# EAGLE board FillControl (EAGLE 9.5.1)

Size 160 x 100 mm. Coordinates in mm from the lower left corner, seen from the top.
Outline: 0,0 160,0 160,100 0,100 0,0
Copper layers (1*16): Top 0.035mm / dielectric 1.5mm / Bottom 0.035mm
Design rules "default": minimum track width 6mil, minimum drill 0.35mm, track to track 6mil, track to pad 6mil, pad to pad 6mil, via to via 6mil, smd to smd 6mil, copper to edge 40mil, drill to drill 6mil, minimum pad ring 10mil, minimum via ring 8mil, stop-mask expansion 4mil, vias tented up to drill 0mil, thermal gap 10mil

## Footprints (pad centres in the part's own frame; a part is rotated, then mirrored left to right if it is on the bottom)
CAP_UCD_8X6P2 = smd 3.912 x 1.626: 1 -3.2,0; 2 3.2,0
CAP_ULH_10X10 = smd 3.81 x 1.905: 1 -4.255,0; 2 4.255,0
DIODE_SOD323 = smd 0.584 x 0.457: 1 -1.055,0; 2 1.055,0
SMC = smd 2.18 x 3.078: 1 -3.127,0; 2 3.127,0
FUS_VISHAY_MFU0805 = smd 0.902 x 1.397: 1 -0.895,0; 2 0.895,0
RELAY_1-1721150-0 = drill 1.295 pad 2.54: 1 -12.192,11.989; 2 -12.192,0; 3 0,11.989; 4 0,0; 5 2.007,5.994
IND_BOURNS_SRR1210 = smd 2.794 x 5.309: 1 -5.042,0; 2 5.042,0
R0603 = smd 1 x 1.1: 1 -0.85,0; 2 0.85,0
SOP-4L_TC = smd 2.007 x 0.94: 1 -4.597,1.27; 2 -4.597,-1.27; 3 4.597,-1.27; 4 4.597,1.27
SOT-23 = smd 0.813 x 0.889: B -1.025,-0.945; C 0,0.945; E 1.025,-0.945
TS5B = smd 1.016 x 2.692: 1 -3.404,-8.28; 2 -1.702,-8.28; 3 0,-8.28; 4 1.702,-8.28; 5 3.404,-8.28 | smd 10.465 x 10.871: 6 0,0
DGS10 = smd 1.575 x 0.229: 1 -2.095,1; 2 -2.095,0.5; 3 -2.095,0; 4 -2.095,-0.5; 5 -2.095,-1; 6 2.095,-1; 7 2.095,-0.5; 8 2.095,0; 9 2.095,0.5; 10 2.095,1
2X20_FEMALE_HEADER = drill 1.105 pad 1.705: 1 0,0; 2 0,2.54; 3 2.54,0; 4 2.54,2.54; 5 5.08,0; 6 5.08,2.54; 7 7.62,0; 8 7.62,2.54; 9 10.16,0; 10 10.16,2.54; 11 12.7,0; 12 12.7,2.54; 13 15.24,0; 14 15.24,2.54; 15 17.78,0; 16 17.78,2.54; 17 20.32,0; 18 20.32,2.54; 19 22.86,0; 20 22.86,2.54; 21 25.4,0; 22 25.4,2.54; 23 27.94,0; 24 27.94,2.54; 25 30.48,0; 26 30.48,2.54; 27 33.02,0; 28 33.02,2.54; 29 35.56,0; 30 35.56,2.54; 31 38.1,0; 32 38.1,2.54; 33 40.64,0; 34 40.64,2.54; 35 43.18,0; 36 43.18,2.54; 37 45.72,0; 38 45.72,2.54; 39 48.26,0; 40 48.26,2.54

## Placement (x,y rotation side)
C1  4.7uF  [CAP_UCD_8X6P2]  -45.72,48.26 0 top  (outside the outline)
C2  [CAP_ULH_10X10]  -58.42,45.72 0 top  (outside the outline)
D1  [DIODE_SOD323]  -69.85,83.82 0 top  (outside the outline)
D2  [DIODE_SOD323]  -73.66,83.82 0 top  (outside the outline)
D3  [DIODE_SOD323]  -77.47,83.82 0 top  (outside the outline)
D4  [DIODE_SOD323]  -81.28,83.82 0 top  (outside the outline)
D5  [DIODE_SOD323]  -15.24,87.63 0 top  (outside the outline)
D6  [DIODE_SOD323]  -19.05,87.63 0 top  (outside the outline)
D7  [SMC]  -69.85,44.45 0 top  (outside the outline)
F1  FUSE  [FUS_VISHAY_MFU0805]  -80.01,-3.81 0 top  (outside the outline)
K1  [RELAY_1-1721150-0]  -17.78,2.54 0 top  (outside the outline)
K2  [RELAY_1-1721150-0]  -38.1,2.54 0 top  (outside the outline)
K3  [RELAY_1-1721150-0]  -58.42,2.54 0 top  (outside the outline)
K4  [RELAY_1-1721150-0]  -17.78,22.86 0 top  (outside the outline)
K5  [RELAY_1-1721150-0]  -38.1,22.86 0 top  (outside the outline)
K6  [RELAY_1-1721150-0]  -58.42,22.86 0 top  (outside the outline)
L1  [IND_BOURNS_SRR1210]  -33.02,46.99 0 top  (outside the outline)
R1  [R0603]  -35.56,83.82 0 top  (outside the outline)
R2  [R0603]  -39.37,83.82 0 top  (outside the outline)
R3  [R0603]  -43.18,83.82 0 top  (outside the outline)
R4  [R0603]  -46.99,83.82 0 top  (outside the outline)
R5  [R0603]  -50.8,83.82 0 top  (outside the outline)
R6  [R0603]  -54.61,83.82 0 top  (outside the outline)
R7  [R0603]  -58.42,83.82 0 top  (outside the outline)
R8  [R0603]  -62.23,83.82 0 top  (outside the outline)
R9  [R0603]  -66.04,83.82 0 top  (outside the outline)
R10  [R0603]  -62.23,76.2 0 top  (outside the outline)
R11  [R0603]  -31.75,83.82 0 top  (outside the outline)
R12  [R0603]  -67.31,76.2 0 top  (outside the outline)
R13  [R0603]  -72.39,76.2 0 top  (outside the outline)
R14  [R0603]  -77.47,76.2 0 top  (outside the outline)
R15  [R0603]  -82.55,76.2 0 top  (outside the outline)
R16  [R0603]  -16.51,83.82 0 top  (outside the outline)
R17  [R0603]  -21.59,83.82 0 top  (outside the outline)
R18  [R0603]  -26.67,83.82 0 top  (outside the outline)
U1  [SOP-4L_TC]  -72.39,62.23 0 top  (outside the outline)
U2  [SOT-23]  -30.48,77.47 0 top  (outside the outline)
U3  [SOP-4L_TC]  -19.05,69.85 0 top  (outside the outline)
U4  [SOT-23]  -35.56,77.47 0 top  (outside the outline)
U5  [SOP-4L_TC]  -31.75,69.85 0 top  (outside the outline)
U6  [SOT-23]  -40.64,77.47 0 top  (outside the outline)
U7  [SOP-4L_TC]  -44.45,69.85 0 top  (outside the outline)
U8  [SOT-23]  -45.72,77.47 0 top  (outside the outline)
U9  [SOP-4L_TC]  -57.15,69.85 0 top  (outside the outline)
U10  [SOT-23]  -50.8,77.47 0 top  (outside the outline)
U11  [SOP-4L_TC]  -69.85,69.85 0 top  (outside the outline)
U12  [SOT-23]  -55.88,77.47 0 top  (outside the outline)
U13  [TS5B]  -19.05,50.8 0 top  (outside the outline)
U14  [DGS10]  -80.01,69.85 0 top  (outside the outline)
U15  [DGS10]  -16.51,77.47 0 top  (outside the outline)
U16  [DGS10]  -24.13,77.47 0 top  (outside the outline)
U$2  [2X20_FEMALE_HEADER]  -63.5,60.96 0 top  (outside the outline)

## Library data of the parts
C1 = FillControl; MANUFACTURER_PART_NUMBER: UUX2A4R7MCL1GS; VENDOR: Nichicon
C2 = FillControl; MANUFACTURER_PART_NUMBER: ULT2D180MNL1GS; VENDOR: Nichicon
D1-D7 K1-K6 U1-U12 U$2 = FillControl
F1 = FillControl; MANUFACTURER_PART_NUMBER: MFU0805FF02000P100; VENDOR: VISHAY
L1 = FillControl; MANUFACTURER_PART_NUMBER: SRR1210680M; VENDOR: Bourns Electronics
R1-R18 = rcl; SPICEPREFIX: R
U13 = FillControl; MANUFACTURER_PART_NUMBER: LM2596SX5.0NOPB; VENDOR: Texas Instruments
U14-U16 = FillControl; MANUFACTURER_PART_NUMBER: ADS1115IDGSR; VENDOR: Texas Instruments

## Nets
+5V: D1.1 D2.1 D3.1 D4.1 D5.1 D6.1 K1.3 K2.3 K3.3 K4.3 K5.3 K6.3 U1.4 U3.4 U5.4 U7.4 U9.4 U11.4
+24V: F1.1
GND: C1.2 C2.2 D7.2 R3.1 R6.1 R9.1 R12.1 R15.1 R18.1 U2.E U4.E U6.E U8.E U10.E U12.E U13.3 U14.3 U15.3 U16.3
N$1: R2.1 U1.3
N$2: D1.2 K1.4 R1.2
N$3: R2.2 U2.B
N$4: R1.1 U2.C
N$5: R3.2 U1.2
N$6: U1.1
N$7: D2.2 K2.4 R4.2
N$8: R5.1 U3.3
N$9: R5.2 U4.B
N$10: R4.1 U4.C
N$11: R6.2 U3.2
N$12: U3.1
N$13: D3.2 K3.4 R7.2
N$14: R8.1 U5.3
N$15: R8.2 U6.B
N$16: R7.1 U6.C
N$17: R9.2 U5.2
N$18: U5.1
N$19: D4.2 K4.4 R10.2
N$20: R11.1 U7.3
N$21: R11.2 U8.B
N$22: R10.1 U8.C
N$23: R12.2 U7.2
N$24: U7.1
N$25: D5.2 K5.4 R13.2
N$26: R14.1 U9.3
N$27: R14.2 U10.B
N$28: R13.1 U10.C
N$29: R15.2 U9.2
N$30: U9.1
N$31: D6.2 K6.4 R16.2
N$32: R17.1 U11.3
N$33: R17.2 U12.B
N$34: R16.1 U12.C
N$35: R18.2 U11.2
N$36: U11.1
N$37: D7.1 L1.2 U13.5
N$38: C1.1 L1.1 U13.4
N$39: U14.10 U15.10 U16.10
N$40: C2.1 F1.2 U13.1
N$41: U14.9 U15.9 U16.9
VDD: U14.8 U15.8 U16.8

## Tracks (layer width: path | path; a pad name or v marks a point on that pad's centre or on a via)
+5V  (17 unrouted)
GND  (18 unrouted)
N$1  (1 unrouted)
N$2  (2 unrouted)
N$3  (1 unrouted)
N$4  (1 unrouted)
N$5  (1 unrouted)
N$7  (2 unrouted)
N$8  (1 unrouted)
N$9  (1 unrouted)
N$10  (1 unrouted)
N$11  (1 unrouted)
N$13  (2 unrouted)
N$14  (1 unrouted)
N$15  (1 unrouted)
N$16  (1 unrouted)
N$17  (1 unrouted)
N$19  (2 unrouted)
N$20  (1 unrouted)
N$21  (1 unrouted)
N$22  (1 unrouted)
N$23  (1 unrouted)
N$25  (2 unrouted)
N$26  (1 unrouted)
N$27  (1 unrouted)
N$28  (1 unrouted)
N$29  (1 unrouted)
N$31  (2 unrouted)
N$32  (1 unrouted)
N$33  (1 unrouted)
N$34  (1 unrouted)
N$35  (1 unrouted)
N$37  (2 unrouted)
N$38  (2 unrouted)
N$39  (2 unrouted)
N$40  (2 unrouted)
N$41  (2 unrouted)
VDD  (2 unrouted)